# Altium PCB PCB1-B-EVT2.PcbDoc (part 3 of 5)
Units mil, origin at the board's own origin, x right, y up, seen from the top; angles counter-clockwise.
Board outline 3000.03 x 3779.56 mil, 2 copper layers (Top Layer, Bottom Layer); 115 components, 91 nets, 486 pads, 285 vias.
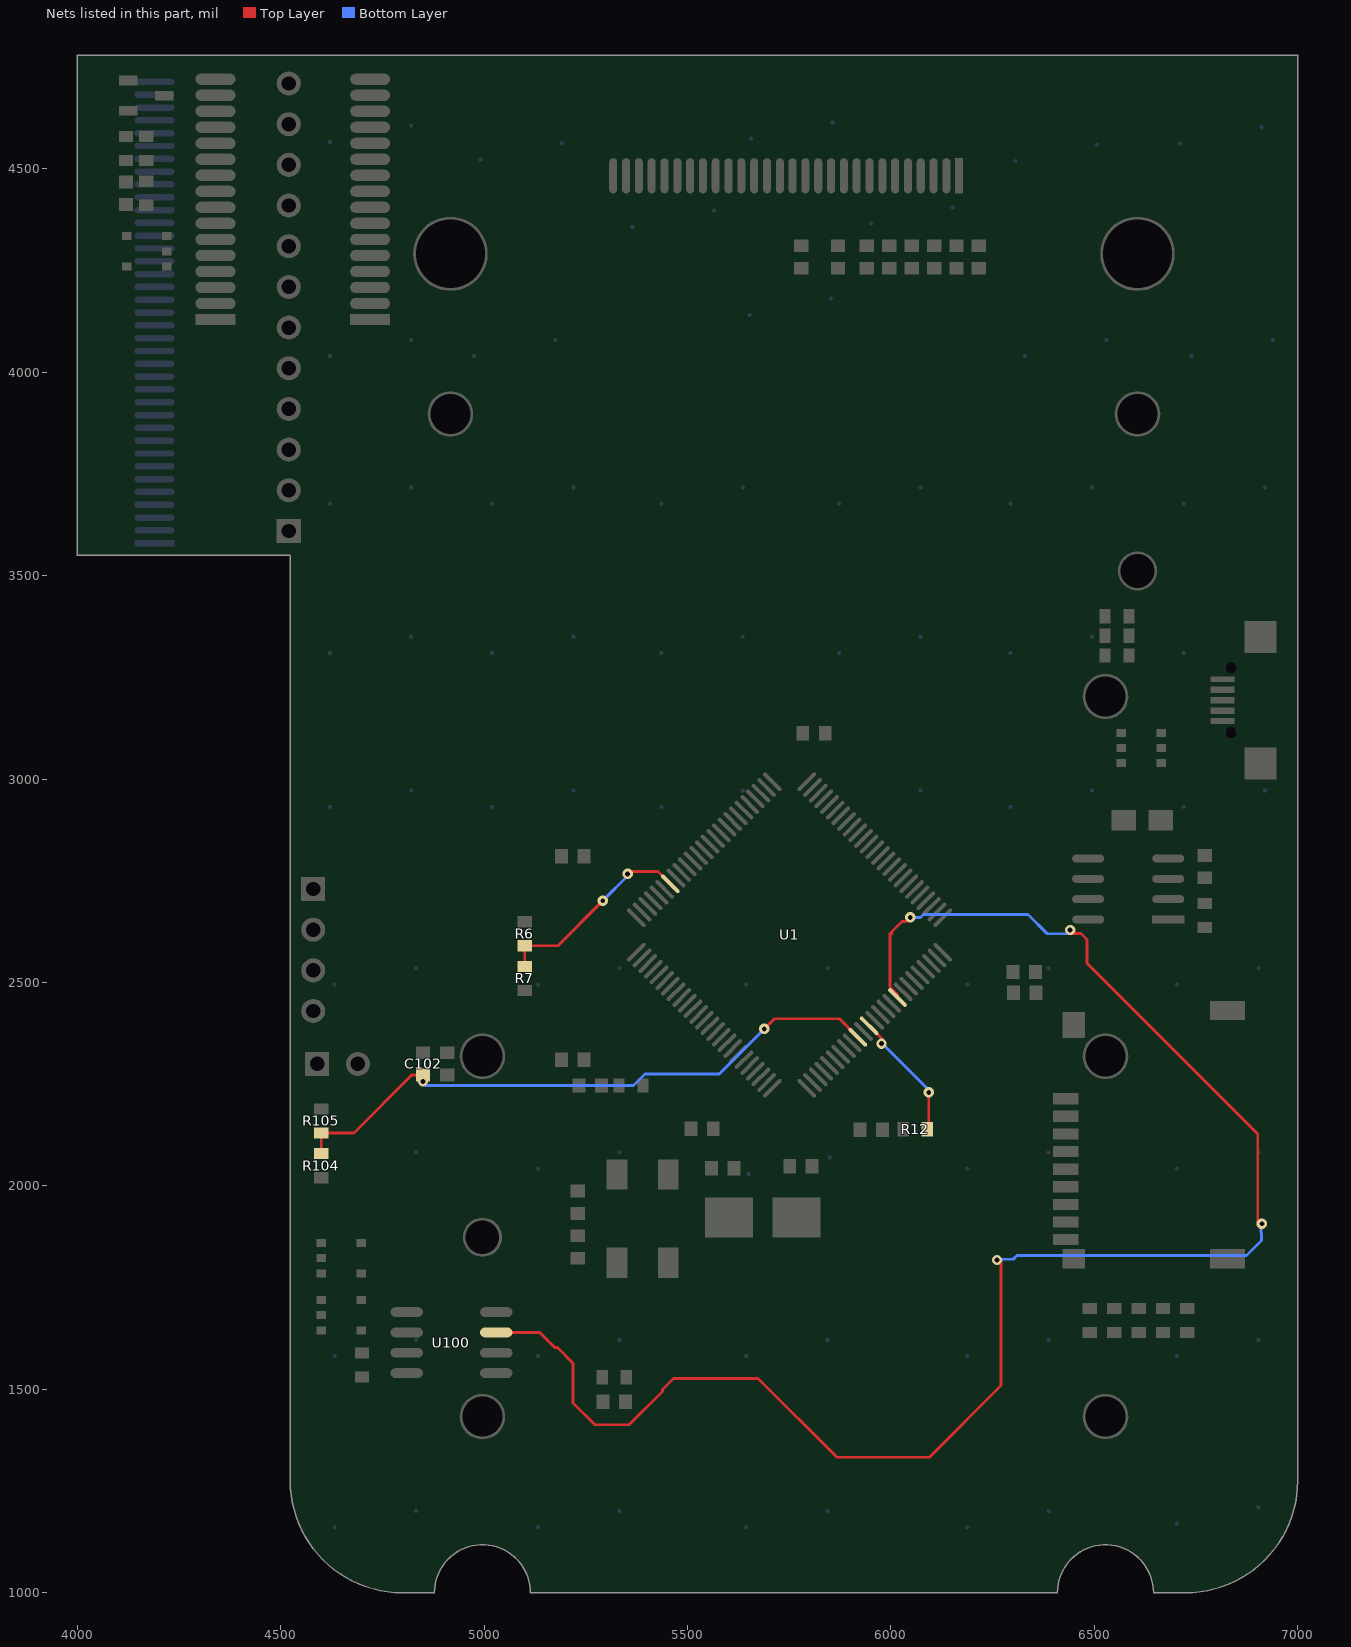
[diagram p3: the nets of this part, all layers, seen from the top]

## Footprints (in the part's own frame and the unit in brackets; to place one, negate y for a bottom-side part, rotate by r counter-clockwise, add the part's x,y. Pads: shape width x height; smd on the part's side, far side on the other; paste and mask are expansions set on the pad) (continued)
Button#33 [mil]
  round 10 smd: 1(120,0) 2(320,-40)
  Top Layer lines w7: 320.19,-12 320,-12 311,-12 146,-12 ; 319,26 312.93,26 150,26 ; 312,-47 299.5,-47 160,-47 ; 304,6 136.5,6 129,6 126.5,6 126,6 ; 303,62 302,62 301.5,62 293,62 172,62 ; 291,-30 148,-30 141.5,-30 129,-30 127,-30 ; 287,44 145,44 134,44 ; 268,-65 149,-65
  Top Layer lines w10: 238.02,-101.12 ccw(c222.55,-0.14) 314.65,-44.35 ccw(c222.55,-0.14) 316.61,-40 ; 235.89,101.15 cw(c222.55,-0.14) 237,101 cw(c222.55,-0.14) 260.14,94.86 cw(c222.55,-0.14) 305.5,59.5 cw(c222.55,-0.14) 307.73,56.27 cw(c222.55,-0.14) 308.66,54.84 ; 323.57,-15.38 ccw(c222.55,-0.14) 324,-12.18 ccw(c222.55,-0.14) 324,11.91 ccw(c222.55,-0.14) 320,30.53 ccw(c222.55,-0.14) 319,33.55 ccw(c222.55,-0.14) 317.55,37.45 ; 323.57,-15.38 cw(c222.55,-0.14) 320,-30.81 ; 323.57,-15.38 cw(c222.55,-0.14) 320,-30.81 ; 320,-30.81 cw(c222.55,-0.14) 316.61,-40 ; 320,-30.81 cw(c222.55,-0.14) 316.61,-40 ; 317.55,37.45 ccw(c222.55,-0.14) 312.93,47.49 ; 317.55,37.45 ccw(c222.55,-0.14) 312.93,47.49 ; 312.93,47.49 ccw(c222.55,-0.14) 308.66,54.84 ; 312.93,47.49 ccw(c222.55,-0.14) 308.66,54.84 ; 211.96,-101.38 cw(c223.45,0.14) 138.27,-56.27 ; 211.96,-101.38 cw(c223.45,0.14) 138.27,-56.27 ; 211.96,-101.38 cw(c223.45,0.14) 138.27,-56.27 ; 211.96,-101.38 cw(c223.45,0.14) 138.27,-56.27 ; 208.82,101.24 ccw(c223.45,0.14) 168.01,85.95 ; 208.82,101.24 ccw(c223.45,0.14) 168.01,85.95 ; 208.82,101.24 ccw(c223.45,0.14) 168.01,85.95 ; 208.82,101.24 ccw(c223.45,0.14) 168.01,85.95 ; 168.01,85.94 ccw(c223.45,0.14) 137.64,55.58 ; 168.01,85.94 ccw(c223.45,0.14) 137.64,55.58 ; 168.01,85.95 ccw(c223.45,0.14) 137.64,55.58 ; 168.01,85.94 ccw(c223.45,0.14) 137.64,55.58 ; 138.27,-56.27 cw(c223.45,0.14) 135.01,-51.01 ; 138.27,-56.27 cw(c223.45,0.14) 135.01,-51.01 ; 138.27,-56.27 cw(c223.45,0.14) 135.01,-51.01 ; 138.27,-56.27 cw(c223.45,0.14) 135.01,-51.01 ; 137.64,55.57 ccw(c223.45,0.14) 134,49.49 ; 137.64,55.57 ccw(c223.45,0.14) 134,49.49 ; 137.64,55.57 ccw(c223.45,0.14) 134,49.49 ; 137.64,55.58 ccw(c223.45,0.14) 134,49.49 ; 135.01,-51.01 cw(c223.45,0.14) 132.2,-45.8 ; 135.01,-51.01 cw(c223.45,0.14) 132.2,-45.8 ; 135.01,-51.01 cw(c223.45,0.14) 132.2,-45.8 ; 135.01,-51.01 cw(c223.45,0.14) 132.2,-45.8 ; 134,49.49 ccw(c223.45,0.14) 131.18,44 ; 134,49.49 ccw(c223.45,0.14) 131.18,44 ; 134,49.49 ccw(c223.45,0.14) 131.18,44 ; 134,49.49 ccw(c223.45,0.14) 131.18,44 ; 132.2,-45.8 cw(c223.45,0.14) 129,-38.81 ; 132.2,-45.8 cw(c223.45,0.14) 129,-38.81 ; 132.2,-45.8 cw(c223.45,0.14) 129,-38.81 ; 132.2,-45.8 cw(c223.45,0.14) 129,-38.81 ; 131.18,44 ccw(c223.45,0.14) 126.5,32.35 ; 131.18,44 ccw(c223.45,0.14) 126.5,32.35 ; 131.18,44 ccw(c223.45,0.14) 126.5,32.35 ; 131.18,44 ccw(c223.45,0.14) 126.5,32.35 ; 129,-38.81 cw(c223.45,0.14) 126.5,-32.08 ; 129,-38.81 cw(c223.45,0.14) 126.5,-32.08 ; 129,-38.81 cw(c223.45,0.14) 126.5,-32.08 ; 129,-38.81 cw(c223.45,0.14) 126.5,-32.08 ; 126.5,-32.08 cw(c223.45,0.14) 125.54,-29.04 ; 126.5,-32.08 cw(c223.45,0.14) 125.54,-29.04 ; 126.5,-32.08 cw(c223.45,0.14) 125.54,-29.04 ; 126.5,-32.08 cw(c223.45,0.14) 125.54,-29.04 ; 126.5,32.35 ccw(c223.45,0.14) 121.29,1.29 ; 126.5,32.35 ccw(c223.45,0.14) 121.29,1.29 ; 126.5,32.35 ccw(c223.45,0.14) 121.29,1.29 ; 126.5,32.35 ccw(c223.45,0.14) 121.29,1.29 ; 126.5,32.35 ccw(c223.45,0.14) 121.29,1.29 ; 126.5,32.35 ccw(c223.45,0.14) 121.29,1.29 ; 126.5,32.35 ccw(c223.45,0.14) 121.29,1.29 ; 126.5,32.35 ccw(c223.45,0.14) 121.29,1.29 ; 125.54,-29.04 cw(c223.45,0.14) 121.3,-1.3 ; 125.54,-29.04 cw(c223.45,0.14) 121.3,-1.3 ; 125.54,-29.04 cw(c223.45,0.14) 121.3,-1.3 ; 125.54,-29.04 cw(c223.45,0.14) 121.3,-1.3 ; 125.54,-29.04 cw(c223.45,0.14) 121.3,-1.3 ; 125.54,-29.04 cw(c223.45,0.14) 121.3,-1.3 ; 125.54,-29.04 cw(c223.45,0.14) 121.3,-1.3 ; 125.54,-29.04 cw(c223.45,0.14) 121.3,-1.3 ; 121.3,-1.3 cw(c223.45,0.14) 121.29,0 ; 121.3,-1.3 cw(c223.45,0.14) 121.29,0 ; 121.3,-1.3 cw(c223.45,0.14) 121.29,0 ; 121.3,-1.3 cw(c223.45,0.14) 121.29,0 ; 121.3,-1.3 cw(c223.45,0.14) 121.29,0 ; 121.3,-1.3 cw(c223.45,0.14) 121.29,0 ; 121.3,-1.3 cw(c223.45,0.14) 121.29,0 ; 121.3,-1.3 cw(c223.45,0.14) 121.29,0 ; 121.29,0 cw(c223.45,0.14) 121.29,1.29 ; 121.29,0 cw(c223.45,0.14) 121.29,1.29 ; 121.29,0 cw(c223.45,0.14) 121.29,1.29 ; 121.29,0 cw(c223.45,0.14) 121.29,1.29 ; 121.29,0 cw(c223.45,0.14) 121.29,1.29 ; 121.29,0 cw(c223.45,0.14) 121.29,1.29 ; 121.29,0 cw(c223.45,0.14) 121.29,1.29 ; 121.29,0 cw(c223.45,0.14) 121.29,1.29
Button#34 [mil]
  round 10 smd: 1(120,0) 2(320,-40)
  Top Layer lines w7: 320.19,-12 319.65,-12 319,-12 315,-12 302.5,-12 146,-12 ; 319,26 150,26 ; 312,-47 298,-47 277.5,-47 160,-47 ; 304,6 136.5,6 127,6 126,6 ; 303,62 302.5,62 172,62 ; 291,-30 141.5,-30 132,-30 127,-30 ; 287,44 136.51,44 134,44 ; 268,-65 149,-65
  Top Layer lines w10: 238.02,-101.12 ccw(c222.55,-0.14) 290,-76.87 ccw(c222.55,-0.14) 313.67,-46.33 ccw(c222.55,-0.14) 314.65,-44.35 ccw(c222.55,-0.14) 317.76,-37.18 ccw(c222.55,-0.14) 319,-33.82 ccw(c222.55,-0.14) 319.65,-31.89 ; 211.95,-101.38 cw(c223.45,0.14) 135.01,-51.01 cw(c223.45,0.14) 131,-43.34 cw(c223.45,0.14) 127,-33.55 cw(c223.45,0.14) 121.29,1.29 cw(c223.45,0.14) 121.46,6 cw(c223.45,0.14) 127,33.82 cw(c223.45,0.14) 127.37,34.86 cw(c223.45,0.14) 128.95,38.95 cw(c223.45,0.14) 208.82,101.24 ; 323.97,-12.46 cw(c222.55,-0.14) 322.8,-19.8 ; 323.97,-12.46 cw(c222.55,-0.14) 322.8,-19.8 ; 323.97,-12.46 ccw(c222.55,-0.14) 320.19,29.92 ; 323.97,-12.46 ccw(c222.55,-0.14) 320.19,29.92 ; 323.97,-12.46 ccw(c222.55,-0.14) 320.19,29.92 ; 323.97,-12.46 ccw(c222.55,-0.14) 320.19,29.92 ; 323.97,-12.46 ccw(c222.55,-0.14) 320.19,29.92 ; 323.97,-12.46 ccw(c222.55,-0.14) 320.19,29.92 ; 323.97,-12.46 ccw(c222.55,-0.14) 320.19,29.92 ; 323.97,-12.46 ccw(c222.55,-0.14) 320.19,29.92 ; 323.97,-12.46 cw(c222.55,-0.14) 322.8,-19.8 ; 323.97,-12.46 cw(c222.55,-0.14) 322.8,-19.8 ; 323.97,-12.46 cw(c222.55,-0.14) 322.8,-19.8 ; 323.97,-12.46 cw(c222.55,-0.14) 322.8,-19.8 ; 323.97,-12.46 cw(c222.55,-0.14) 322.8,-19.8 ; 323.97,-12.46 cw(c222.55,-0.14) 322.8,-19.8 ; 322.8,-19.8 cw(c222.55,-0.14) 319.65,-31.88 ; 322.8,-19.8 cw(c222.55,-0.14) 319.65,-31.88 ; 322.8,-19.8 cw(c222.55,-0.14) 319.65,-31.89 ; 322.8,-19.8 cw(c222.55,-0.14) 319.65,-31.88 ; 320.19,29.92 ccw(c222.55,-0.14) 319.39,32.39 ; 320.19,29.92 ccw(c222.55,-0.14) 319.39,32.39 ; 320.19,29.92 ccw(c222.55,-0.14) 319.39,32.39 ; 320.19,29.92 ccw(c222.55,-0.14) 319.39,32.39 ; 319.39,32.39 ccw(c222.55,-0.14) 319,33.55 ; 319.39,32.39 ccw(c222.55,-0.14) 319,33.55 ; 319.39,32.39 ccw(c222.55,-0.14) 319,33.55 ; 319.39,32.39 ccw(c222.55,-0.14) 319,33.55 ; 319,33.55 ccw(c222.55,-0.14) 306.69,57.81 ; 319,33.55 ccw(c222.55,-0.14) 306.69,57.81 ; 319,33.55 ccw(c222.55,-0.14) 306.69,57.81 ; 319,33.55 ccw(c222.55,-0.14) 306.69,57.81 ; 306.69,57.81 ccw(c222.55,-0.14) 305.5,59.5 ; 306.69,57.81 ccw(c222.55,-0.14) 305.5,59.5 ; 306.69,57.81 ccw(c222.55,-0.14) 305.5,59.5 ; 306.69,57.81 ccw(c222.55,-0.14) 305.5,59.5 ; 305.5,59.5 ccw(c222.55,-0.14) 235.89,101.15 ; 305.5,59.5 ccw(c222.55,-0.14) 235.89,101.15 ; 305.5,59.5 ccw(c222.55,-0.14) 235.89,101.15 ; 305.5,59.5 ccw(c222.55,-0.14) 235.89,101.15
Button#35 [mil]
  round 10 smd: 1(120,0) 2(320,-40)
  Top Layer lines w7: 320.19,-12 318.5,-12 317.5,-12 146,-12 ; 319,26 317.5,26 150,26 ; 312,-47 282.5,-47 160,-47 ; 304,6 139.5,6 127,6 126,6 ; 303,62 172,62 ; 291,-30 152,-30 141.5,-30 127,-30 ; 287,44 160,44 134,44 ; 268,-65 149,-65
  Top Layer lines w10: 211.96,-101.38 cw(c223.45,0.14) 209,-101 cw(c223.45,0.14) 146.7,-67.3 cw(c223.45,0.14) 136.5,-53.5 cw(c223.45,0.14) 134.25,-49.67 cw(c223.45,0.14) 121.29,1.29 cw(c223.45,0.14) 121.46,6 cw(c223.45,0.14) 127,33.82 cw(c223.45,0.14) 128.5,37.84 cw(c223.45,0.14) 128.95,38.95 cw(c223.45,0.14) 142.08,61.92 cw(c223.45,0.14) 208.82,101.24 ; 323.57,-15.38 cw(c222.55,-0.14) 320.19,-30.19 ; 323.57,-15.38 ccw(c222.55,-0.14) 323.57,15.11 ; 323.57,-15.38 cw(c222.55,-0.14) 320.19,-30.19 ; 323.57,-15.38 cw(c222.55,-0.14) 320.19,-30.19 ; 323.57,-15.38 cw(c222.55,-0.14) 320.19,-30.19 ; 323.57,-15.38 cw(c222.55,-0.14) 320.19,-30.19 ; 323.57,-15.38 ccw(c222.55,-0.14) 323.57,15.11 ; 323.57,-15.38 ccw(c222.55,-0.14) 323.57,15.11 ; 323.57,-15.38 ccw(c222.55,-0.14) 323.57,15.11 ; 323.57,-15.38 ccw(c222.55,-0.14) 323.57,15.11 ; 323.57,-15.38 ccw(c222.55,-0.14) 323.57,15.11 ; 323.57,-15.38 ccw(c222.55,-0.14) 323.57,15.11 ; 323.57,-15.38 ccw(c222.55,-0.14) 323.57,15.11 ; 323.57,-15.38 cw(c222.55,-0.14) 320.19,-30.19 ; 323.57,-15.38 cw(c222.55,-0.14) 320.19,-30.19 ; 323.57,-15.38 cw(c222.55,-0.14) 320.19,-30.19 ; 323.57,15.11 ccw(c222.55,-0.14) 319,33.55 ; 323.57,15.11 ccw(c222.55,-0.14) 319,33.55 ; 323.57,15.11 ccw(c222.55,-0.14) 319,33.55 ; 323.57,15.11 ccw(c222.55,-0.14) 319,33.55 ; 323.57,15.11 ccw(c222.55,-0.14) 319,33.55 ; 323.57,15.11 ccw(c222.55,-0.14) 319,33.55 ; 323.57,15.11 ccw(c222.55,-0.14) 319,33.55 ; 323.57,15.11 ccw(c222.55,-0.14) 319,33.55 ; 320.19,-30.19 cw(c222.55,-0.14) 317.6,-37.6 ; 320.19,-30.19 cw(c222.55,-0.14) 317.6,-37.6 ; 320.19,-30.19 cw(c222.55,-0.14) 317.6,-37.6 ; 320.19,-30.19 cw(c222.55,-0.14) 317.6,-37.6 ; 319,33.55 ccw(c222.55,-0.14) 305.5,59.5 ; 319,33.55 ccw(c222.55,-0.14) 305.5,59.5 ; 319,33.55 ccw(c222.55,-0.14) 305.5,59.5 ; 319,33.55 ccw(c222.55,-0.14) 305.5,59.5 ; 317.6,-37.6 cw(c222.55,-0.14) 314.65,-44.35 ; 317.6,-37.6 cw(c222.55,-0.14) 314.65,-44.35 ; 317.6,-37.6 cw(c222.55,-0.14) 314.65,-44.35 ; 317.6,-37.6 cw(c222.55,-0.14) 314.65,-44.35 ; 314.65,-44.35 cw(c222.55,-0.14) 313.67,-46.33 ; 314.65,-44.35 cw(c222.55,-0.14) 313.67,-46.33 ; 314.65,-44.35 cw(c222.55,-0.14) 313.67,-46.33 ; 314.65,-44.35 cw(c222.55,-0.14) 313.67,-46.33 ; 313.67,-46.33 cw(c222.55,-0.14) 283.5,-82.12 ; 313.67,-46.33 cw(c222.55,-0.14) 283.5,-82.12 ; 313.67,-46.33 cw(c222.55,-0.14) 283.5,-82.12 ; 313.67,-46.33 cw(c222.55,-0.14) 283.5,-82.12 ; 305.5,59.5 ccw(c222.55,-0.14) 303.64,62 ; 305.5,59.5 ccw(c222.55,-0.14) 303.64,62 ; 305.5,59.5 ccw(c222.55,-0.14) 303.64,62 ; 305.5,59.5 ccw(c222.55,-0.14) 303.64,62 ; 303.64,62 ccw(c222.55,-0.14) 235.89,101.15 ; 303.64,62 ccw(c222.55,-0.14) 235.89,101.15 ; 303.64,62 ccw(c222.55,-0.14) 235.89,101.15 ; 303.64,62 ccw(c222.55,-0.14) 235.89,101.15 ; 283.5,-82.12 cw(c222.55,-0.14) 268.74,-91.26 ; 283.5,-82.12 cw(c222.55,-0.14) 268.74,-91.26 ; 283.5,-82.12 cw(c222.55,-0.14) 268.74,-91.26 ; 283.5,-82.12 cw(c222.55,-0.14) 268.74,-91.26 ; 268.74,-91.26 cw(c222.55,-0.14) 238.02,-101.12 ; 268.74,-91.26 cw(c222.55,-0.14) 238.02,-101.12 ; 268.74,-91.26 cw(c222.55,-0.14) 238.02,-101.12 ; 268.74,-91.26 cw(c222.55,-0.14) 238.02,-101.12
Button#36 [mil]
  round 10 smd: 1(120,0) 2(320,-40)
  Top Layer lines w7: 320.19,-12 320,-12 319,-12 302.7,-12 146,-12 ; 319,26 299.1,26 150,26 ; 312,-47 305.7,-47 299.7,-47 160,-47 ; 304,6 138.1,6 127,6 126,6 ; 303,62 172,62 ; 291,-30 149.6,-30 143.3,-30 127,-30 ; 287,44 137.6,44 134,44 ; 268,-65 152.8,-65 149,-65
  Top Layer lines w10: 211.96,-101.38 cw(c223.45,0.14) 146.7,-67.3 cw(c223.45,0.14) 121.29,1.29 cw(c223.45,0.14) 121.46,6 cw(c223.45,0.14) 126.78,33.18 cw(c223.45,0.14) 127,33.82 cw(c223.45,0.14) 128.7,38.34 cw(c223.45,0.14) 128.81,38.6 cw(c223.45,0.14) 128.95,38.95 cw(c223.45,0.14) 208.82,101.24 ; 324.64,3.6 cw(c222.55,-0.14) 324.43,-7.76 ; 324.64,3.6 cw(c222.55,-0.14) 324.43,-7.76 ; 324.64,3.6 cw(c222.55,-0.14) 324.43,-7.76 ; 324.64,3.6 cw(c222.55,-0.14) 324.43,-7.76 ; 324.64,3.6 cw(c222.55,-0.14) 324.43,-7.76 ; 324.64,3.6 cw(c222.55,-0.14) 324.43,-7.76 ; 324.64,3.6 cw(c222.55,-0.14) 324.43,-7.76 ; 324.64,3.6 cw(c222.55,-0.14) 324.43,-7.76 ; 324.64,3.6 ccw(c222.55,-0.14) 320.19,29.92 ; 324.64,3.6 ccw(c222.55,-0.14) 320.19,29.92 ; 324.64,3.6 ccw(c222.55,-0.14) 320.19,29.92 ; 324.64,3.6 ccw(c222.55,-0.14) 320.19,29.92 ; 324.64,3.6 ccw(c222.55,-0.14) 320.19,29.92 ; 324.64,3.6 ccw(c222.55,-0.14) 320.19,29.92 ; 324.64,3.6 ccw(c222.55,-0.14) 320.19,29.92 ; 324.64,3.6 ccw(c222.55,-0.14) 320.19,29.92 ; 324.43,-7.76 cw(c222.55,-0.14) 322.17,-22.77 ; 324.43,-7.76 cw(c222.55,-0.14) 322.17,-22.77 ; 324.43,-7.76 cw(c222.55,-0.14) 322.17,-22.77 ; 324.43,-7.76 cw(c222.55,-0.14) 322.17,-22.77 ; 322.17,-22.78 cw(c222.55,-0.14) 320,-30.81 ; 322.17,-22.78 cw(c222.55,-0.14) 320,-30.81 ; 322.17,-22.78 cw(c222.55,-0.14) 320,-30.81 ; 322.17,-22.78 cw(c222.55,-0.14) 320,-30.81 ; 322.17,-22.78 cw(c222.55,-0.14) 320,-30.81 ; 322.17,-22.78 cw(c222.55,-0.14) 320,-30.81 ; 322.17,-22.78 cw(c222.55,-0.14) 320,-30.81 ; 322.17,-22.78 cw(c222.55,-0.14) 320,-30.81 ; 320.19,29.92 ccw(c222.55,-0.14) 320,30.53 ; 320.19,29.92 ccw(c222.55,-0.14) 320,30.53 ; 320.19,29.92 ccw(c222.55,-0.14) 320,30.53 ; 320.19,29.92 ccw(c222.55,-0.14) 320,30.53 ; 320,-30.81 cw(c222.55,-0.14) 319,-33.82 ; 320,-30.81 cw(c222.55,-0.14) 319,-33.82 ; 320,-30.81 cw(c222.55,-0.14) 319,-33.82 ; 320,-30.81 cw(c222.55,-0.14) 319,-33.82 ; 320,30.53 ccw(c222.55,-0.14) 319,33.55 ; 320,30.53 ccw(c222.55,-0.14) 319,33.55 ; 320,30.53 ccw(c222.55,-0.14) 319,33.55 ; 320,30.53 ccw(c222.55,-0.14) 319,33.55 ; 319,-33.82 cw(c222.55,-0.14) 315.7,-42.09 ; 319,-33.82 cw(c222.55,-0.14) 315.7,-42.09 ; 319,-33.82 cw(c222.55,-0.14) 315.7,-42.09 ; 319,-33.82 cw(c222.55,-0.14) 315.7,-42.09 ; 319,33.55 ccw(c222.55,-0.14) 315.46,42.36 ; 319,33.55 ccw(c222.55,-0.14) 315.46,42.36 ; 319,33.55 ccw(c222.55,-0.14) 315.46,42.36 ; 319,33.55 ccw(c222.55,-0.14) 315.46,42.36 ; 315.7,-42.09 cw(c222.55,-0.14) 314.65,-44.35 ; 315.7,-42.09 cw(c222.55,-0.14) 314.65,-44.35 ; 315.7,-42.09 cw(c222.55,-0.14) 314.65,-44.35 ; 315.7,-42.09 cw(c222.55,-0.14) 314.65,-44.35 ; 315.46,42.36 ccw(c222.55,-0.14) 305.5,59.5 ; 315.46,42.36 ccw(c222.55,-0.14) 305.5,59.5 ; 315.46,42.36 ccw(c222.55,-0.14) 305.5,59.5 ; 315.46,42.36 ccw(c222.55,-0.14) 305.5,59.5 ; 314.65,-44.35 cw(c222.55,-0.14) 313.67,-46.33 ; 314.65,-44.35 cw(c222.55,-0.14) 313.67,-46.33 ; 314.65,-44.35 cw(c222.55,-0.14) 313.67,-46.33 ; 314.65,-44.35 cw(c222.55,-0.14) 313.67,-46.33 ; 313.67,-46.33 cw(c222.55,-0.14) 313.33,-47 ; 313.67,-46.33 cw(c222.55,-0.14) 313.33,-47 ; 313.67,-46.33 cw(c222.55,-0.14) 313.33,-47 ; 313.67,-46.33 cw(c222.55,-0.14) 313.33,-47 ; 313.33,-47 cw(c222.55,-0.14) 308.06,-56.04 ; 313.33,-47 cw(c222.55,-0.14) 308.06,-56.04 ; 313.33,-47 cw(c222.55,-0.14) 308.06,-56.04 ; 313.33,-47 cw(c222.55,-0.14) 308.06,-56.04 ; 308.06,-56.04 cw(c222.55,-0.14) 305.7,-59.49 ; 308.06,-56.04 cw(c222.55,-0.14) 305.7,-59.49 ; 308.06,-56.04 cw(c222.55,-0.14) 305.7,-59.49 ; 308.06,-56.04 cw(c222.55,-0.14) 305.7,-59.49 ; 305.7,-59.49 cw(c222.55,-0.14) 238.02,-101.12 ; 305.7,-59.49 cw(c222.55,-0.14) 238.02,-101.12 ; 305.7,-59.49 cw(c222.55,-0.14) 238.02,-101.12 ; 305.7,-59.49 cw(c222.55,-0.14) 238.02,-101.12 ; 305.5,59.5 ccw(c222.55,-0.14) 303.64,62 ; 305.5,59.5 ccw(c222.55,-0.14) 303.64,62 ; 305.5,59.5 ccw(c222.55,-0.14) 303.64,62 ; 305.5,59.5 ccw(c222.55,-0.14) 303.64,62 ; 303.64,62 ccw(c222.55,-0.14) 235.89,101.15 ; 303.64,62 ccw(c222.55,-0.14) 235.89,101.15 ; 303.64,62 ccw(c222.55,-0.14) 235.89,101.15 ; 303.64,62 ccw(c222.55,-0.14) 235.89,101.15
Button#37 [mil]
  round 10 smd: 1(120,0) 2(320,-40)
  Top Layer lines w7: 320.19,-12 319,-12 302.7,-12 146,-12 ; 319,26 150,26 ; 312,-47 306.7,-47 160,-47 ; 304,6 126,6 ; 303,62 290.2,62 250.99,62 172,62 ; 291,-30 162.7,-30 140.2,-30 127,-30 ; 287,44 152.7,44 134,44 ; 268,-65 227.7,-65 162.7,-65 149,-65
  Top Layer lines w10: 238.02,-101.12 ccw(c222.55,-0.14) 313.67,-46.33 ccw(c222.55,-0.14) 314.65,-44.35 ; 235.89,101.15 cw(c222.55,-0.14) 305.5,59.5 cw(c222.55,-0.14) 319,33.55 cw(c222.55,-0.14) 320.19,29.92 cw(c222.55,-0.14) 324.7,1.46 ; 208.82,101.24 ccw(c223.45,0.14) 204.9,100.6 ccw(c223.45,0.14) 139.7,58.64 ccw(c223.45,0.14) 131.18,44 ccw(c223.45,0.14) 128.95,38.95 ccw(c223.45,0.14) 126,30.81 ccw(c223.45,0.14) 121.46,6 ; 324.7,-1.73 cw(c222.55,-0.14) 314.65,-44.35 ; 324.7,-1.73 cw(c222.55,-0.14) 314.65,-44.35 ; 324.7,-1.73 ccw(c222.55,-0.14) 324.7,1.46 ; 324.7,-1.73 ccw(c222.55,-0.14) 324.7,1.46 ; 211.7,-101.35 cw(c223.45,0.14) 146.7,-67.3 cw(c223.45,0.14) 144.74,-65 cw(c223.45,0.14) 135.01,-51.01 cw(c223.45,0.14) 127,-33.55 cw(c223.45,0.14) 125.33,-28.33 cw(c223.45,0.14) 121.7,-9.03 ; 211.7,-101.35 ccw(c223.45,0.14) 211.95,-101.38 cw(c223.45,0.14) 211.7,-101.35 ; 121.7,-9.03 cw(c223.45,0.14) 121.29,-0.01 ; 121.7,-9.03 cw(c223.45,0.14) 121.29,-0.01 ; 121.46,6 ccw(c223.45,0.14) 121.29,0.42 ; 121.46,6 ccw(c223.45,0.14) 121.29,0.42 ; 121.29,0 cw(c223.45,0.14) 121.29,0.28 ; 121.29,0 cw(c223.45,0.14) 121.29,0.28 ; 121.29,0.28 cw(c223.45,0.14) 121.29,0.42 ; 121.29,0.28 cw(c223.45,0.14) 121.29,0.42
Button#38 [mil]
  round 10 smd: 1(120,0) 2(320,-40)
  Top Layer lines w7: 320.19,-12 320,-12 319.5,-12 317.5,-12 298,-12 146,-12 ; 319,26 313.1,26 312.5,26 236.9,26 150,26 ; 312,-47 302,-47 160,-47 ; 304,6 137.9,6 127,6 126,6 ; 303,62 172,62 ; 291,-30 149.4,-30 143.1,-30 127,-30 ; 287,44 134,44 ; 268,-65 152.6,-65 149,-65
  Top Layer lines w10: 238.02,-101.12 ccw(c222.55,-0.14) 313.33,-47 ccw(c222.55,-0.14) 313.67,-46.33 ; 235.89,101.15 cw(c222.55,-0.14) 305.5,59.5 cw(c222.55,-0.14) 319,33.55 cw(c222.55,-0.14) 319.5,32.08 cw(c222.55,-0.14) 320,30.53 ; 211.96,-101.38 cw(c223.45,0.14) 172.3,-88.3 ; 208.82,101.24 ccw(c223.45,0.14) 131.18,44 ccw(c223.45,0.14) 128.95,38.95 ccw(c223.45,0.14) 128.81,38.6 ccw(c223.45,0.14) 128.5,37.84 ccw(c223.45,0.14) 127,33.82 ccw(c223.45,0.14) 121.46,6 ; 320,-30.81 cw(c222.55,-0.14) 313.67,-46.33 ; 320,-30.81 cw(c222.55,-0.14) 313.67,-46.33 ; 320,-30.81 ccw(c222.55,-0.14) 320,30.53 ; 320,-30.81 ccw(c222.55,-0.14) 320,30.53 ; 172.3,-88.3 cw(c223.45,0.14) 121.29,1.29 ; 172.3,-88.3 cw(c223.45,0.14) 121.29,1.29 ; 121.46,6 ccw(c223.45,0.14) 121.29,1.29 ; 121.46,6 ccw(c223.45,0.14) 121.29,1.29
Button#39 [mil]
  round 10 smd: 1(120,0) 2(320,-40)
  Top Layer lines w7: 320.19,-12 146,-12 ; 319,26 303.3,26 150,26 ; 312,-47 306.78,-47 160,-47 ; 304,6 127,6 126,6 ; 303,62 301.9,62 172,62 ; 291,-30 154.8,-30 140.5,-30 127,-30 ; 287,44 134,44 ; 268,-65 232.3,-65 156,-65 149,-65
  Top Layer lines w10: 238.02,-101.12 ccw(c222.55,-0.14) 277.9,-86 ; 211.96,-101.38 cw(c223.45,0.14) 211.9,-101.37 cw(c223.45,0.14) 151.11,-72 cw(c223.45,0.14) 144.74,-65 cw(c223.45,0.14) 126,-30.53 cw(c223.45,0.14) 121.95,-11.45 ; 208.82,101.24 ccw(c223.45,0.14) 153.9,74.97 ccw(c223.45,0.14) 128.95,38.95 ccw(c223.45,0.14) 127,33.82 ; 320.19,29.92 ccw(c222.55,-0.14) 235.89,101.15 cw(c222.55,-0.14) 320.19,29.92 ; 320.19,29.92 cw(c222.55,-0.14) 314.65,-44.35 ; 320.19,29.92 cw(c222.55,-0.14) 314.65,-44.35 ; 314.65,-44.35 cw(c222.55,-0.14) 313.67,-46.33 cw(c222.55,-0.14) 313.33,-47 ; 313.33,-47 cw(c222.55,-0.14) 306.78,-57.95 ; 313.33,-47 cw(c222.55,-0.14) 306.78,-57.95 ; 306.78,-57.95 cw(c222.55,-0.14) 280.36,-84.37 ; 306.78,-57.95 cw(c222.55,-0.14) 280.36,-84.37 ; 280.36,-84.37 cw(c222.55,-0.14) 277.9,-86 ; 280.36,-84.37 cw(c222.55,-0.14) 277.9,-86 ; 127,33.82 ccw(c223.45,0.14) 121.43,5.53 ; 127,33.82 ccw(c223.45,0.14) 121.43,5.53 ; 121.95,-11.45 cw(c223.45,0.14) 121.43,-5.26 ; 121.95,-11.45 cw(c223.45,0.14) 121.43,-5.26 ; 121.43,-5.26 cw(c223.45,0.14) 121.29,0 ; 121.43,-5.26 cw(c223.45,0.14) 121.29,0 ; 121.43,5.53 ccw(c223.45,0.14) 121.29,0 ; 121.43,5.53 ccw(c223.45,0.14) 121.29,0
Button#40 [mil]
  round 10 smd: 1(120,0) 2(320,-40)
  Top Layer lines w7: 320.19,-12 320,-12 319,-12 146,-12 ; 319,26 303,26 150,26 ; 312,-47 291.6,-47 284.2,-47 160,-47 ; 304,6 136.1,6 127,6 126,6 ; 303,62 301.6,62 229.6,62 172,62 ; 291,-30 148.6,-30 143.1,-30 127,-30 ; 287,44 136.1,44 134,44 ; 268,-65 167.82,-65 151.6,-65 149,-65
  Top Layer lines w10: 238.02,-101.12 ccw(c222.55,-0.14) 313.67,-46.33 ccw(c222.55,-0.14) 315.1,-43.4 ccw(c222.55,-0.14) 320,-30.81 ; 235.89,101.15 cw(c222.55,-0.14) 282.18,82.82 cw(c222.55,-0.14) 305.5,59.5 cw(c222.55,-0.14) 308.48,55.12 cw(c222.55,-0.14) 319,33.55 cw(c222.55,-0.14) 320,30.53 cw(c222.55,-0.14) 322.08,22.92 ; 211.96,-101.38 cw(c223.45,0.14) 202.72,-99.9 cw(c223.45,0.14) 145.08,-65.4 cw(c223.45,0.14) 121.29,1.29 cw(c223.45,0.14) 121.46,6 cw(c223.45,0.14) 127,33.82 cw(c223.45,0.14) 127.61,35.51 cw(c223.45,0.14) 128.95,38.95 ; 324.51,-6.49 cw(c222.55,-0.14) 322.95,-19.02 ; 324.51,-6.49 cw(c222.55,-0.14) 322.95,-19.02 ; 324.51,-6.49 ccw(c222.55,-0.14) 322.95,18.75 ; 324.51,-6.49 ccw(c222.55,-0.14) 322.95,18.75 ; 322.95,-19.02 cw(c222.55,-0.14) 320,-30.81 ; 322.95,-19.02 cw(c222.55,-0.14) 320,-30.81 ; 322.95,18.75 ccw(c222.55,-0.14) 322.08,22.92 ; 322.95,18.75 ccw(c222.55,-0.14) 322.08,22.92 ; 160.95,80.95 cw(c223.45,0.14) 208.82,101.24 ccw(c223.45,0.14) 160.95,80.95 ; 160.94,80.94 ccw(c223.45,0.14) 142.64,62.64 ; 160.94,80.94 ccw(c223.45,0.14) 142.64,62.64 ; 142.64,62.64 ccw(c223.45,0.14) 128.95,38.95 ; 142.64,62.64 ccw(c223.45,0.14) 128.95,38.95
Button#41 [mil]
  round 10 smd: 1(120,0) 2(320,-40)
  Top Layer lines w7: 320.19,-12 318.7,-12 302.7,-12 146,-12 ; 319,26 302.7,26 150,26 ; 312,-47 308.92,-47 291.7,-47 284.7,-47 282.2,-47 160,-47 ; 304,6 137.2,6 127,6 126,6 ; 303,62 172,62 ; 291,-30 142.2,-30 127.7,-30 127,-30 ; 287,44 137.7,44 134,44 ; 268,-65 165.2,-65 149,-65
  Top Layer lines w10: 235.89,101.15 cw(c222.55,-0.14) 282.18,82.82 cw(c222.55,-0.14) 305.5,59.5 cw(c222.55,-0.14) 316.56,39.86 cw(c222.55,-0.14) 322.08,22.92 cw(c222.55,-0.14) 322.28,22.01 cw(c222.55,-0.14) 322.98,18.58 cw(c222.55,-0.14) 324.53,-6.17 cw(c222.55,-0.14) 324.43,-7.76 cw(c222.55,-0.14) 320,-30.81 ; 211.96,-101.38 cw(c223.45,0.14) 155.55,-76.2 cw(c223.45,0.14) 144.74,-65 cw(c223.45,0.14) 135.01,-51.01 cw(c223.45,0.14) 126,-30.53 cw(c223.45,0.14) 125.83,-30 cw(c223.45,0.14) 125.06,-27.36 cw(c223.45,0.14) 121.7,-9.03 cw(c223.45,0.14) 121.29,1.29 ; 320,-30.81 cw(c222.55,-0.14) 317.11,-38.81 ; 320,-30.81 cw(c222.55,-0.14) 317.11,-38.81 ; 317.11,-38.82 cw(c222.55,-0.14) 313.33,-47 ; 317.11,-38.82 cw(c222.55,-0.14) 313.33,-47 ; 313.33,-47 cw(c222.55,-0.14) 300.9,-65.7 ; 300.9,-65.7 cw(c222.55,-0.14) 261.23,-94.69 ; 300.9,-65.7 cw(c222.55,-0.14) 261.23,-94.69 ; 261.23,-94.69 cw(c222.55,-0.14) 238.02,-101.12 ccw(c222.55,-0.14) 261.23,-94.69 ; 131.18,44 ccw(c223.45,0.14) 128.95,38.95 ccw(c223.45,0.14) 127,33.82 ccw(c223.45,0.14) 126.73,33.03 ccw(c223.45,0.14) 121.7,9.31 ; 131.18,44 cw(c223.45,0.14) 208.82,101.24 ccw(c223.45,0.14) 131.18,44 ; 121.7,9.31 ccw(c223.45,0.14) 121.46,6 ; 121.7,9.31 ccw(c223.45,0.14) 121.46,6 ; 121.46,6 ccw(c223.45,0.14) 121.29,1.29 ; 121.46,6 ccw(c223.45,0.14) 121.29,1.29
Button#42 [mil]
  round 10 smd: 1(120,0) 2(320,-40)
  Top Layer lines w7: 320.19,-12 319,-12 146,-12 ; 319,26 307.2,26 150,26 ; 312,-47 160,-47 ; 304,6 140.2,6 127,6 126,6 ; 303,62 294.7,62 172,62 ; 291,-30 141.2,-30 127,-30 ; 287,44 134,44 ; 268,-65 149,-65
  Top Layer lines w10: 211.96,-101.38 cw(c223.45,0.14) 209,-101 cw(c223.45,0.14) 144.74,-65 cw(c223.45,0.14) 135.01,-51.01 cw(c223.45,0.14) 127,-33.55 cw(c223.45,0.14) 121.29,0 cw(c223.45,0.14) 126,30.81 cw(c223.45,0.14) 127,33.82 cw(c223.45,0.14) 128.95,38.95 cw(c223.45,0.14) 131.18,44 cw(c223.45,0.14) 208.82,101.24 ; 323.87,-13.19 ccw(c222.55,-0.14) 323.87,12.92 ; 323.87,-13.19 ccw(c222.55,-0.14) 323.87,12.92 ; 323.87,-13.19 ccw(c222.55,-0.14) 323.87,12.92 ; 323.87,-13.19 ccw(c222.55,-0.14) 323.87,12.92 ; 323.87,-13.19 ccw(c222.55,-0.14) 323.87,12.92 ; 323.87,-13.19 ccw(c222.55,-0.14) 323.87,12.92 ; 323.87,-13.19 ccw(c222.55,-0.14) 323.87,12.92 ; 323.87,-13.19 ccw(c222.55,-0.14) 323.87,12.92 ; 323.87,-13.2 cw(c222.55,-0.14) 321.7,-24.76 ; 323.87,-13.2 cw(c222.55,-0.14) 321.7,-24.76 ; 323.87,-13.2 cw(c222.55,-0.14) 321.7,-24.76 ; 323.87,-13.2 cw(c222.55,-0.14) 321.7,-24.76 ; 323.87,-13.2 cw(c222.55,-0.14) 321.7,-24.76 ; 323.87,-13.2 cw(c222.55,-0.14) 321.7,-24.76 ; 323.87,-13.2 cw(c222.55,-0.14) 321.7,-24.76 ; 323.87,-13.2 cw(c222.55,-0.14) 321.7,-24.76 ; 323.87,12.93 ccw(c222.55,-0.14) 319,33.55 ; 323.87,12.93 ccw(c222.55,-0.14) 319,33.55 ; 323.87,12.93 ccw(c222.55,-0.14) 319,33.55 ; 323.87,12.93 ccw(c222.55,-0.14) 319,33.55 ; 323.87,12.93 ccw(c222.55,-0.14) 319,33.55 ; 323.87,12.93 ccw(c222.55,-0.14) 319,33.55 ; 323.87,12.93 ccw(c222.55,-0.14) 319,33.55 ; 323.87,12.93 ccw(c222.55,-0.14) 319,33.55 ; 321.7,-24.76 cw(c222.55,-0.14) 319,-33.82 ; 321.7,-24.76 cw(c222.55,-0.14) 319,-33.82 ; 321.7,-24.76 cw(c222.55,-0.14) 319,-33.82 ; 321.7,-24.76 cw(c222.55,-0.14) 319,-33.82 ; 319,-33.82 cw(c222.55,-0.14) 314.65,-44.35 ; 319,-33.82 cw(c222.55,-0.14) 314.65,-44.35 ; 319,-33.82 cw(c222.55,-0.14) 314.65,-44.35 ; 319,-33.82 cw(c222.55,-0.14) 314.65,-44.35 ; 319,33.55 ccw(c222.55,-0.14) 305.5,59.5 ; 319,33.55 ccw(c222.55,-0.14) 305.5,59.5 ; 319,33.55 ccw(c222.55,-0.14) 305.5,59.5 ; 319,33.55 ccw(c222.55,-0.14) 305.5,59.5 ; 314.65,-44.35 cw(c222.55,-0.14) 313.67,-46.33 ; 314.65,-44.35 cw(c222.55,-0.14) 313.67,-46.33 ; 314.65,-44.35 cw(c222.55,-0.14) 313.67,-46.33 ; 314.65,-44.35 cw(c222.55,-0.14) 313.67,-46.33 ; 313.67,-46.33 cw(c222.55,-0.14) 268.74,-91.26 ; 313.67,-46.33 cw(c222.55,-0.14) 268.74,-91.26 ; 313.67,-46.33 cw(c222.55,-0.14) 268.74,-91.26 ; 313.67,-46.33 cw(c222.55,-0.14) 268.74,-91.26 ; 305.5,59.5 ccw(c222.55,-0.14) 303.64,62 ; 305.5,59.5 ccw(c222.55,-0.14) 303.64,62 ; 305.5,59.5 ccw(c222.55,-0.14) 303.64,62 ; 305.5,59.5 ccw(c222.55,-0.14) 303.64,62 ; 303.64,62 ccw(c222.55,-0.14) 263.04,93.66 ; 303.64,62 ccw(c222.55,-0.14) 263.04,93.66 ; 303.64,62 ccw(c222.55,-0.14) 263.04,93.66 ; 303.64,62 ccw(c222.55,-0.14) 263.04,93.66 ; 268.74,-91.26 cw(c222.55,-0.14) 266.77,-92.23 ; 268.74,-91.26 cw(c222.55,-0.14) 266.77,-92.23 ; 268.74,-91.26 cw(c222.55,-0.14) 266.77,-92.23 ; 268.74,-91.26 cw(c222.55,-0.14) 266.77,-92.23 ; 266.77,-92.23 cw(c222.55,-0.14) 238.02,-101.12 ; 266.77,-92.23 cw(c222.55,-0.14) 238.02,-101.12 ; 266.77,-92.23 cw(c222.55,-0.14) 238.02,-101.12 ; 266.77,-92.23 cw(c222.55,-0.14) 238.02,-101.12 ; 263.04,93.66 ccw(c222.55,-0.14) 237,101 ; 263.04,93.66 ccw(c222.55,-0.14) 237,101 ; 263.04,93.66 ccw(c222.55,-0.14) 237,101 ; 263.04,93.66 ccw(c222.55,-0.14) 237,101 ; 237,101 ccw(c222.55,-0.14) 235.89,101.15 ; 237,101 ccw(c222.55,-0.14) 235.89,101.15 ; 237,101 ccw(c222.55,-0.14) 235.89,101.15 ; 237,101 ccw(c222.55,-0.14) 235.89,101.15
Button#43 [mil]
  round 10 smd: 1(120,0) 2(320,-40)
  Top Layer lines w7: 320.19,-12 146,-12 ; 319,26 150,26 ; 312,-47 160,-47 ; 304,6 142.4,6 127,6 126,6 ; 303,62 172,62 ; 291,-30 140.2,-30 129.7,-30 127,-30 ; 287,44 168,44 135.9,44 134,44 ; 268,-65 230.4,-65 223.7,-65 149,-65
  Top Layer lines w10: 322.17,22.5 cw(c222.55,-0.14) 324.71,0.31 cw(c222.55,-0.14) 320.19,-30.19 cw(c222.55,-0.14) 316.61,-40 cw(c222.55,-0.14) 314.65,-44.35 ; 322.17,22.51 ccw(c222.55,-0.14) 235.89,101.15 cw(c222.55,-0.14) 322.17,22.51 ; 314.65,-44.35 cw(c222.55,-0.14) 313.67,-46.33 ; 314.65,-44.35 cw(c222.55,-0.14) 313.67,-46.33 ; 313.67,-46.33 cw(c222.55,-0.14) 268.74,-91.26 ; 313.67,-46.33 cw(c222.55,-0.14) 268.74,-91.26 ; 268.74,-91.26 cw(c222.55,-0.14) 238.02,-101.12 ccw(c222.55,-0.14) 268.74,-91.26 ; 211.96,-101.38 cw(c223.45,0.14) 146.7,-67.3 ; 211.96,-101.38 cw(c223.45,0.14) 146.7,-67.3 ; 211.96,-101.38 cw(c223.45,0.14) 146.7,-67.3 ; 211.96,-101.38 cw(c223.45,0.14) 146.7,-67.3 ; 208.82,101.24 ccw(c223.45,0.14) 128.95,38.95 ; 208.82,101.24 ccw(c223.45,0.14) 128.95,38.95 ; 208.82,101.24 ccw(c223.45,0.14) 128.95,38.95 ; 208.82,101.24 ccw(c223.45,0.14) 128.95,38.95 ; 208.82,101.24 ccw(c223.45,0.14) 128.95,38.95 ; 208.82,101.24 ccw(c223.45,0.14) 128.95,38.95 ; 208.82,101.24 ccw(c223.45,0.14) 128.95,38.95 ; 208.82,101.24 ccw(c223.45,0.14) 128.95,38.95 ; 146.7,-67.3 cw(c223.45,0.14) 144.74,-65 ; 146.7,-67.3 cw(c223.45,0.14) 144.74,-65 ; 146.7,-67.3 cw(c223.45,0.14) 144.74,-65 ; 146.7,-67.3 cw(c223.45,0.14) 144.74,-65 ; 144.74,-65 cw(c223.45,0.14) 135.15,-51.25 ; 144.74,-65 cw(c223.45,0.14) 135.15,-51.25 ; 144.74,-65 cw(c223.45,0.14) 135.15,-51.25 ; 144.74,-65 cw(c223.45,0.14) 135.15,-51.25 ; 135.15,-51.25 cw(c223.45,0.14) 135.01,-51.01 ; 135.15,-51.25 cw(c223.45,0.14) 135.01,-51.01 ; 135.15,-51.25 cw(c223.45,0.14) 135.01,-51.01 ; 135.15,-51.25 cw(c223.45,0.14) 135.01,-51.01 ; 135.01,-51.01 cw(c223.45,0.14) 127,-33.55 ; 135.01,-51.01 cw(c223.45,0.14) 127,-33.55 ; 135.01,-51.01 cw(c223.45,0.14) 127,-33.55 ; 135.01,-51.01 cw(c223.45,0.14) 127,-33.55 ; 128.95,38.95 ccw(c223.45,0.14) 127.72,35.82 ; 128.95,38.95 ccw(c223.45,0.14) 127.72,35.82 ; 128.95,38.95 ccw(c223.45,0.14) 127.72,35.82 ; 128.95,38.95 ccw(c223.45,0.14) 127.72,35.82 ; 128.95,38.95 ccw(c223.45,0.14) 127.72,35.82 ; 128.95,38.95 ccw(c223.45,0.14) 127.72,35.82 ; 128.95,38.95 ccw(c223.45,0.14) 127.72,35.82 ; 128.95,38.95 ccw(c223.45,0.14) 127.72,35.82 ; 127.72,35.82 ccw(c223.45,0.14) 127,33.82 ; 127.72,35.82 ccw(c223.45,0.14) 127,33.82 ; 127.72,35.82 ccw(c223.45,0.14) 127,33.82 ; 127.72,35.82 ccw(c223.45,0.14) 127,33.82 ; 127.72,35.82 ccw(c223.45,0.14) 127,33.82 ; 127.72,35.82 ccw(c223.45,0.14) 127,33.82 ; 127.72,35.82 ccw(c223.45,0.14) 127,33.82 ; 127.72,35.82 ccw(c223.45,0.14) 127,33.82 ; 127,-33.55 cw(c223.45,0.14) 121.99,-11.79 ; 127,-33.55 cw(c223.45,0.14) 121.99,-11.79 ; 127,-33.55 cw(c223.45,0.14) 121.99,-11.79 ; 127,-33.55 cw(c223.45,0.14) 121.99,-11.79 ; 127,33.82 ccw(c223.45,0.14) 126,30.81 ; 127,33.82 ccw(c223.45,0.14) 126,30.81 ; 127,33.82 ccw(c223.45,0.14) 126,30.81 ; 127,33.82 ccw(c223.45,0.14) 126,30.81 ; 127,33.82 ccw(c223.45,0.14) 126,30.81 ; 127,33.82 ccw(c223.45,0.14) 126,30.81 ; 127,33.82 ccw(c223.45,0.14) 126,30.81 ; 127,33.82 ccw(c223.45,0.14) 126,30.81 ; 126,30.81 ccw(c223.45,0.14) 121.7,9.31 ; 126,30.81 ccw(c223.45,0.14) 121.7,9.31 ; 126,30.81 ccw(c223.45,0.14) 121.7,9.31 ; 126,30.81 ccw(c223.45,0.14) 121.7,9.31 ; 126,30.81 ccw(c223.45,0.14) 121.7,9.31 ; 126,30.81 ccw(c223.45,0.14) 121.7,9.31 ; 126,30.81 ccw(c223.45,0.14) 121.7,9.31 ; 126,30.81 ccw(c223.45,0.14) 121.7,9.31 ; 121.99,-11.79 cw(c223.45,0.14) 121.7,-9.03 ; 121.99,-11.79 cw(c223.45,0.14) 121.7,-9.03 ; 121.99,-11.79 cw(c223.45,0.14) 121.7,-9.03 ; 121.99,-11.79 cw(c223.45,0.14) 121.7,-9.03 ; 121.7,-9.03 cw(c223.45,0.14) 121.29,0 ; 121.7,-9.03 cw(c223.45,0.14) 121.29,0 ; 121.7,-9.03 cw(c223.45,0.14) 121.29,0 ; 121.7,-9.03 cw(c223.45,0.14) 121.29,0 ; 121.7,9.31 ccw(c223.45,0.14) 121.33,2.94 ; 121.7,9.31 ccw(c223.45,0.14) 121.33,2.94 ; 121.7,9.31 ccw(c223.45,0.14) 121.33,2.94 ; 121.7,9.31 ccw(c223.45,0.14) 121.33,2.94 ; 121.7,9.31 ccw(c223.45,0.14) 121.33,2.94 ; 121.7,9.31 ccw(c223.45,0.14) 121.33,2.94 ; 121.7,9.31 ccw(c223.45,0.14) 121.33,2.94 ; 121.7,9.31 ccw(c223.45,0.14) 121.33,2.94 ; 121.33,2.93 ccw(c223.45,0.14) 121.29,1.29 ; 121.33,2.93 ccw(c223.45,0.14) 121.29,1.29 ; 121.33,2.93 ccw(c223.45,0.14) 121.29,1.29 ; 121.33,2.93 ccw(c223.45,0.14) 121.29,1.29 ; 121.29,0 cw(c223.45,0.14) 121.29,1.29 ; 121.29,0 cw(c223.45,0.14) 121.29,1.29 ; 121.29,0 cw(c223.45,0.14) 121.29,1.29 ; 121.29,0 cw(c223.45,0.14) 121.29,1.29
Button#44 [mil]
  round 10 smd: 1(120,0) 2(320,-40)
  Top Layer lines w7: 320.19,-12 319,-12 307.9,-12 303,-12 146,-12 ; 319,26 150,26 ; 312,-47 311.7,-47 295.1,-47 160,-47 ; 304,6 131.7,6 130.7,6 127,6 126,6 ; 303,62 301,62 195.54,62 172,62 ; 291,-30 131.7,-30 130.7,-30 127.7,-30 127,-30 ; 287,44 144.9,44 134,44 ; 268,-65 227.7,-65 149,-65
  Top Layer lines w10: 235.89,101.15 cw(c222.55,-0.14) 249.89,98.3 cw(c222.55,-0.14) 276.18,86.82 cw(c222.55,-0.14) 305.5,59.5 cw(c222.55,-0.14) 309.5,53.5 cw(c222.55,-0.14) 319,33.55 cw(c222.55,-0.14) 320.19,29.92 cw(c222.55,-0.14) 321.31,26 cw(c222.55,-0.14) 324.6,4.7 ; 211.96,-101.38 cw(c223.45,0.14) 144.74,-65 cw(c223.45,0.14) 135.01,-51.01 cw(c223.45,0.14) 130.7,-42.7 cw(c223.45,0.14) 126,-30.53 cw(c223.45,0.14) 125.33,-28.33 cw(c223.45,0.14) 125.06,-27.36 ; 208.82,101.24 ccw(c223.45,0.14) 131.18,44 ccw(c223.45,0.14) 128.95,38.95 ccw(c223.45,0.14) 127,33.82 ; 324.65,-3.73 ccw(c222.55,-0.14) 324.6,4.7 ; 324.65,-3.73 cw(c222.55,-0.14) 314.37,-44.93 ; 324.65,-3.73 cw(c222.55,-0.14) 314.37,-44.93 ; 324.65,-3.73 ccw(c222.55,-0.14) 324.6,4.7 ; 314.37,-44.93 cw(c222.55,-0.14) 313.67,-46.33 ; 314.37,-44.93 cw(c222.55,-0.14) 313.67,-46.33 ; 313.67,-46.33 cw(c222.55,-0.14) 268.74,-91.26 ; 313.67,-46.33 cw(c222.55,-0.14) 268.74,-91.26 ; 268.74,-91.26 cw(c222.55,-0.14) 238.02,-101.12 ccw(c222.55,-0.14) 268.74,-91.26 ; 127,33.82 ccw(c223.45,0.14) 121.46,6 ; 127,33.82 ccw(c223.45,0.14) 121.46,6 ; 125.06,-27.36 cw(c223.45,0.14) 121.29,1.29 ; 125.06,-27.36 cw(c223.45,0.14) 121.29,1.29 ; 121.46,6 ccw(c223.45,0.14) 121.29,1.29 ; 121.46,6 ccw(c223.45,0.14) 121.29,1.29
Button#45 [mil]
  round 10 smd: 1(120,0) 2(320,-40)
  Top Layer lines w7: 320.19,-12 300.6,-12 298.3,-12 146,-12 ; 319,26 150,26 ; 312,-47 297.4,-47 160,-47 ; 304,6 134.5,6 130.5,6 127,6 126,6 ; 303,62 292,62 172,62 ; 291,-30 134.5,-30 130.5,-30 127,-30 ; 287,44 147,44 134,44 ; 268,-65 154.12,-65 149,-65
  Top Layer lines w10: 238.02,-101.12 ccw(c222.55,-0.14) 313.33,-47 ccw(c222.55,-0.14) 317.11,-38.82 ccw(c222.55,-0.14) 319.29,-32.99 ccw(c222.55,-0.14) 324.43,-7.76 ccw(c222.55,-0.14) 322.08,22.92 ccw(c222.55,-0.14) 303.36,62.36 ccw(c222.55,-0.14) 235.89,101.15 ; 211.95,-101.38 cw(c223.45,0.14) 182.65,-93.53 cw(c223.45,0.14) 146.7,-67.3 cw(c223.45,0.14) 144.74,-65 cw(c223.45,0.14) 123,-18.5 cw(c223.45,0.14) 121.53,-6.97 cw(c223.45,0.14) 121.29,1.29 cw(c223.45,0.14) 121.46,6 ; 208.82,101.24 ccw(c223.45,0.14) 128.95,38.95 ccw(c223.45,0.14) 127,33.82 ; 127,33.82 ccw(c223.45,0.14) 126,30.81 ; 127,33.82 ccw(c223.45,0.14) 126,30.81 ; 126,30.81 ccw(c223.45,0.14) 121.46,6 ; 126,30.81 ccw(c223.45,0.14) 121.46,6
Button#46 [mil]
  round 10 smd: 1(120,0) 2(320,-40)
  Top Layer lines w7: 320.19,-12 319,-12 307.9,-12 146,-12 ; 319,26 150,26 ; 312,-47 296.3,-47 160,-47 ; 304,6 145.4,6 128.9,6 127,6 126,6 ; 303,62 172,62 ; 291,-30 154.1,-30 146.9,-30 128.9,-30 127,-30 ; 287,44 143.1,44 134,44 ; 268,-65 149,-65
  Top Layer lines w10: 238.02,-101.12 ccw(c222.55,-0.14) 313.33,-47 ccw(c222.55,-0.14) 320.19,29.92 ; 235.89,101.15 cw(c222.55,-0.14) 282.18,82.82 cw(c222.55,-0.14) 305.5,59.5 cw(c222.55,-0.14) 319,33.55 ; 211.96,-101.38 cw(c223.45,0.14) 211.9,-101.37 cw(c223.45,0.14) 172.3,-88.3 cw(c223.45,0.14) 144.74,-65 cw(c223.45,0.14) 138.9,-57.21 cw(c223.45,0.14) 135.01,-51.01 cw(c223.45,0.14) 128.9,-38.56 cw(c223.45,0.14) 121.29,1.29 cw(c223.45,0.14) 121.46,6 cw(c223.45,0.14) 124.9,27.06 cw(c223.45,0.14) 126,30.81 cw(c223.45,0.14) 127,33.82 cw(c223.45,0.14) 128.95,38.95 cw(c223.45,0.14) 208.82,101.24 ; 320.19,29.92 ccw(c222.55,-0.14) 320,30.53 ; 320.19,29.92 ccw(c222.55,-0.14) 320,30.53 ; 320,30.53 ccw(c222.55,-0.14) 319,33.55 ; 320,30.53 ccw(c222.55,-0.14) 319,33.55
Button#47 [mil]
  round 10 smd: 1(120,0) 2(320,-40)
  Top Layer lines w7: 320.19,-12 320,-12 146,-12 ; 319,26 171.3,26 150,26 ; 312,-47 160,-47 ; 304,6 129.1,6 128.6,6 127,6 126,6 ; 303,62 301.6,62 300.49,62 172,62 ; 291,-30 130.9,-30 129.1,-30 127,-30 ; 287,44 142.8,44 134,44 ; 268,-65 149.1,-65 149,-65
  Top Layer lines w10: 238.02,-101.12 ccw(c222.55,-0.14) 310.8,-51.6 ccw(c222.55,-0.14) 312,-49.49 ccw(c222.55,-0.14) 313.67,-46.33 ccw(c222.55,-0.14) 320,-30.81 ; 235.89,101.15 cw(c222.55,-0.14) 241.26,100.3 cw(c222.55,-0.14) 305.5,59.5 cw(c222.55,-0.14) 308.48,55.12 cw(c222.55,-0.14) 310.29,52.21 cw(c222.55,-0.14) 319,33.55 cw(c222.55,-0.14) 320,30.53 cw(c222.55,-0.14) 320.19,29.92 ; 211.96,-101.38 cw(c223.45,0.14) 144.6,-64.82 cw(c223.45,0.14) 141.6,-61 cw(c223.45,0.14) 135.01,-51.01 cw(c223.45,0.14) 129.1,-39.05 cw(c223.45,0.14) 121.46,6 cw(c223.45,0.14) 126,30.8 cw(c223.45,0.14) 127,33.82 cw(c223.45,0.14) 128.6,38.09 cw(c223.45,0.14) 128.95,38.95 cw(c223.45,0.14) 129.1,39.32 cw(c223.45,0.14) 208.82,101.24 ; 324.38,-8.36 cw(c222.55,-0.14) 323.6,-15.17 ; 324.38,-8.36 cw(c222.55,-0.14) 323.6,-15.17 ; 324.38,-8.36 ccw(c222.55,-0.14) 323.6,14.9 ; 324.38,-8.36 ccw(c222.55,-0.14) 323.6,14.9 ; 323.6,-15.17 cw(c222.55,-0.14) 320,-30.81 ; 323.6,-15.17 cw(c222.55,-0.14) 320,-30.81 ; 323.6,14.9 ccw(c222.55,-0.14) 320.19,29.92 ; 323.6,14.9 ccw(c222.55,-0.14) 320.19,29.92
Button#48 [mil]
  round 10 smd: 1(120,0) 2(320,-40)
  Top Layer lines w7: 320.19,-12 319,-12 146,-12 ; 319,26 150,26 ; 312,-47 160,-47 ; 304,6 140.2,6 127.7,6 127.29,6 127.15,6 127,6 126,6 ; 303,62 290.2,62 172,62 ; 291,-30 140.2,-30 127.7,-30 127,-30 ; 287,44 140.2,44 137.7,44 134,44 ; 268,-65 227.7,-65 165.2,-65 149,-65
  Top Layer lines w10: 235.89,101.15 cw(c222.55,-0.14) 305.5,59.5 cw(c222.55,-0.14) 322.08,22.92 cw(c222.55,-0.14) 322.98,18.58 cw(c222.55,-0.14) 317.6,-37.6 ; 208.82,101.24 ccw(c223.45,0.14) 131.7,45.07 ccw(c223.45,0.14) 128.95,38.95 ccw(c223.45,0.14) 127,33.82 ccw(c223.45,0.14) 123.75,22.45 ccw(c223.45,0.14) 121.29,0 ccw(c223.45,0.14) 121.89,-10.9 ccw(c223.45,0.14) 121.99,-11.79 ccw(c223.45,0.14) 127,-33.55 ccw(c223.45,0.14) 127.7,-35.49 ccw(c223.45,0.14) 135.01,-51.01 ccw(c223.45,0.14) 144.74,-65 ccw(c223.45,0.14) 155.49,-76.15 ccw(c223.45,0.14) 169.67,-86.73 ; 317.6,-37.6 cw(c222.55,-0.14) 313.67,-46.33 ; 317.6,-37.6 cw(c222.55,-0.14) 313.67,-46.33 ; 313.67,-46.33 cw(c222.55,-0.14) 313.33,-47 ; 313.67,-46.33 cw(c222.55,-0.14) 313.33,-47 ; 313.33,-47 cw(c222.55,-0.14) 268.74,-91.26 ; 313.33,-47 cw(c222.55,-0.14) 268.74,-91.26 ; 268.74,-91.26 cw(c222.55,-0.14) 238.02,-101.12 ccw(c222.55,-0.14) 268.74,-91.26 ; 211.7,-101.35 cw(c223.45,0.14) 169.67,-86.73 ; 211.7,-101.35 cw(c223.45,0.14) 169.67,-86.73 ; 211.7,-101.35 ccw(c223.45,0.14) 211.95,-101.38 cw(c223.45,0.14) 211.7,-101.35
Button#49 [mil]
  round 10 smd: 1(120,0) 2(320,-40)
  Top Layer lines w7: 320.19,-12 146,-12 ; 319,26 150,26 ; 312,-47 307,-47 306.7,-47 160,-47 ; 304,6 143.2,6 131.7,6 130.7,6 127,6 126,6 ; 303,62 172,62 ; 291,-30 138.2,-30 131.7,-30 130.7,-30 127,-30 ; 287,44 152.7,44 140.2,44 134,44 ; 268,-65 149,-65
  Top Layer lines w10: 211.96,-101.38 cw(c223.45,0.14) 211.7,-101.35 cw(c223.45,0.14) 144.74,-65 cw(c223.45,0.14) 135.01,-51.01 cw(c223.45,0.14) 130.7,-42.7 cw(c223.45,0.14) 127,-33.55 cw(c223.45,0.14) 122.28,-14.08 cw(c223.45,0.14) 121.7,-9.03 cw(c223.45,0.14) 121.35,3.65 cw(c223.45,0.14) 121.46,6 cw(c223.45,0.14) 121.7,9.31 cw(c223.45,0.14) 124.33,24.87 cw(c223.45,0.14) 124.82,26.75 cw(c223.45,0.14) 127,33.82 cw(c223.45,0.14) 128.95,38.95 cw(c223.45,0.14) 130.7,42.97 cw(c223.45,0.14) 130.73,43.03 cw(c223.45,0.14) 139.03,57.67 cw(c223.45,0.14) 207.22,101 cw(c223.45,0.14) 208.82,101.24 ; 324.71,-1.02 cw(c222.55,-0.14) 324.42,-7.83 ; 324.71,-1.02 cw(c222.55,-0.14) 324.42,-7.83 ; 324.71,-1.02 cw(c222.55,-0.14) 324.42,-7.83 ; 324.71,-1.02 cw(c222.55,-0.14) 324.42,-7.83 ; 324.71,-1.02 cw(c222.55,-0.14) 324.42,-7.83 ; 324.71,-1.02 cw(c222.55,-0.14) 324.42,-7.83 ; 324.71,-1.02 cw(c222.55,-0.14) 324.42,-7.83 ; 324.71,-1.02 ccw(c222.55,-0.14) 324.42,7.56 ; 324.71,-1.02 ccw(c222.55,-0.14) 324.42,7.56 ; 324.71,-1.02 ccw(c222.55,-0.14) 324.42,7.56 ; 324.71,-1.02 cw(c222.55,-0.14) 324.42,-7.83 ; 324.71,-1.02 ccw(c222.55,-0.14) 324.42,7.56 ; 324.42,-7.83 cw(c222.55,-0.14) 320.19,-30.19 ; 324.42,-7.83 cw(c222.55,-0.14) 320.19,-30.19 ; 324.42,-7.83 cw(c222.55,-0.14) 320.19,-30.19 ; 324.42,-7.83 cw(c222.55,-0.14) 320.19,-30.19 ; 324.42,-7.83 cw(c222.55,-0.14) 320.19,-30.19 ; 324.42,-7.83 cw(c222.55,-0.14) 320.19,-30.19 ; 324.42,-7.83 cw(c222.55,-0.14) 320.19,-30.19 ; 324.42,-7.83 cw(c222.55,-0.14) 320.19,-30.19 ; 324.42,7.56 ccw(c222.55,-0.14) 319,33.55 ; 324.42,7.56 ccw(c222.55,-0.14) 319,33.55 ; 324.42,7.56 ccw(c222.55,-0.14) 319,33.55 ; 324.42,7.56 ccw(c222.55,-0.14) 319,33.55 ; 324.42,7.56 ccw(c222.55,-0.14) 319,33.55 ; 324.42,7.56 ccw(c222.55,-0.14) 319,33.55 ; 324.42,7.56 ccw(c222.55,-0.14) 319,33.55 ; 324.42,7.56 ccw(c222.55,-0.14) 319,33.55 ; 320.19,-30.19 cw(c222.55,-0.14) 318.51,-35.19 ; 320.19,-30.19 cw(c222.55,-0.14) 318.51,-35.19 ; 320.19,-30.19 cw(c222.55,-0.14) 318.51,-35.19 ; 320.19,-30.19 cw(c222.55,-0.14) 318.51,-35.19 ; 319,33.55 ccw(c222.55,-0.14) 305.5,59.5 ; 319,33.55 ccw(c222.55,-0.14) 305.5,59.5 ; 319,33.55 ccw(c222.55,-0.14) 305.5,59.5 ; 319,33.55 ccw(c222.55,-0.14) 305.5,59.5 ; 318.51,-35.19 cw(c222.55,-0.14) 315.6,-42.32 ; 318.51,-35.19 cw(c222.55,-0.14) 315.6,-42.32 ; 318.51,-35.19 cw(c222.55,-0.14) 315.6,-42.32 ; 318.51,-35.19 cw(c222.55,-0.14) 315.6,-42.32 ; 315.6,-42.32 cw(c222.55,-0.14) 313.33,-47 ; 315.6,-42.32 cw(c222.55,-0.14) 313.33,-47 ; 315.6,-42.32 cw(c222.55,-0.14) 313.33,-47 ; 315.6,-42.32 cw(c222.55,-0.14) 313.33,-47 ; 313.33,-47 cw(c222.55,-0.14) 266.77,-92.23 ; 313.33,-47 cw(c222.55,-0.14) 266.77,-92.23 ; 313.33,-47 cw(c222.55,-0.14) 266.77,-92.23 ; 313.33,-47 cw(c222.55,-0.14) 266.77,-92.23 ; 305.5,59.5 ccw(c222.55,-0.14) 235.89,101.15 ; 305.5,59.5 ccw(c222.55,-0.14) 235.89,101.15 ; 305.5,59.5 ccw(c222.55,-0.14) 235.89,101.15 ; 305.5,59.5 ccw(c222.55,-0.14) 235.89,101.15 ; 266.77,-92.23 cw(c222.55,-0.14) 260.73,-94.89 ; 266.77,-92.23 cw(c222.55,-0.14) 260.73,-94.89 ; 266.77,-92.23 cw(c222.55,-0.14) 260.73,-94.89 ; 266.77,-92.23 cw(c222.55,-0.14) 260.73,-94.89 ; 260.73,-94.89 cw(c222.55,-0.14) 238.02,-101.12 ; 260.73,-94.89 cw(c222.55,-0.14) 238.02,-101.12 ; 260.73,-94.89 cw(c222.55,-0.14) 238.02,-101.12 ; 260.73,-94.89 cw(c222.55,-0.14) 238.02,-101.12
Button#50 [mil]
  round 10 smd: 1(120,0) 2(320,-40)
  Top Layer lines w10: 320.19,-12 309.8,-12 303.7,-12 146,-12 ; 319,26 306.2,26 150,26 ; 312,-47 305,-47 160,-47 ; 304,6 132,6 131,6 127,6 126,6 ; 303,62 172,62 ; 291,-30 146,-30 132,-30 131,-30 128.5,-30 127,-30 ; 287,44 143.8,44 134,44 ; 268,-65 231.26,-65 195.7,-65 149,-65 ; 238.02,-101.12 ccw(c222.55,-0.14) 313.33,-47 ; 235.89,101.15 cw(c222.55,-0.14) 303.64,62 cw(c222.55,-0.14) 320.19,29.92 cw(c222.55,-0.14) 324.4,7.8 cw(c222.55,-0.14) 324.6,4.63 ; 211.96,-101.38 cw(c223.45,0.14) 144.74,-65 cw(c223.45,0.14) 135.01,-51.01 cw(c223.45,0.14) 131,-43.34 cw(c223.45,0.14) 126,-30.53 cw(c223.45,0.14) 125.33,-28.33 cw(c223.45,0.14) 124.75,-26.25 cw(c223.45,0.14) 121.29,1.29 cw(c223.45,0.14) 121.46,6 cw(c223.45,0.14) 127,33.82 cw(c223.45,0.14) 128.95,38.95 cw(c223.45,0.14) 131.18,44 cw(c223.45,0.14) 208.82,101.24 ; 324.6,4.63 cw(c222.55,-0.14) 317.11,-38.82 ; 324.6,4.63 cw(c222.55,-0.14) 317.11,-38.82 ; 317.11,-38.82 cw(c222.55,-0.14) 313.33,-47 ; 317.11,-38.82 cw(c222.55,-0.14) 313.33,-47
CON_16P_1.0MM [mm]
  rect 2.5x0.7 smd: 1(0,0)
  oval 2.5x0.7 smd: 2(0,-1) 3(0,-2) 4(0,-3) 5(0,-4) 6(0,-5) 7(0,-6) 8(0,-7) 9(0,-8) 10(0,-9) 11(0,-10) 12(0,-11) 13(0,-12) 14(0,-13) 15(0,-14) 16(0,-15)
HDR1X2 [mm] "Connector; Header; 2 Position"
  rect 1.5x1.5 hole 0.9: 1(0,0)
  round 1.5 hole 0.9: 2(2.54,0)
  silkscreen extent -1.27,-1.27 3.81,1.27
HDR1X4 [mm] "Connector; Header; 4 Position"
  rect 1.5x1.5 hole 0.9: 1(0,0)
  round 1.5 hole 0.9: 2(2.54,0) 3(5.08,0) 4(7.62,0)
  silkscreen extent -1.27,-1.27 8.89,1.27
HDR1X12 [mm] "Connector; Header; 12 Position"
  rect 1.5x1.5 hole 0.9: 1(0,0)
  round 1.5 hole 0.9: 2(2.54,0) 3(5.08,0) 4(7.62,0) 5(10.16,0) 6(12.7,0) 7(15.24,0) 8(17.78,0) 9(20.32,0) 10(22.86,0) 11(25.4,0) 12(27.94,0)
  silkscreen extent -1.27,-1.27 29.21,1.27
J1-0603 [mm] "Chip Resistor, Body 1.6x0.8mm, IPC High Density"
  rect 0.7x0.9 smd: 1(-0.75,0) 2(0.75,0)
  silkscreen extent -0.2,-0.35 0.2,0.35, body extent -0.85,-0.48 0.85,0.48, height 0.9
LCD_28P [mm]
  rect 2.2x0.5 smd: 1(0,0)
  oval 2.2x0.5 smd: 2(0,-0.8) 3(0,-1.6) 4(0,-2.4) 5(0,-3.2) 6(0,-4) 7(0,-4.8) 8(0,-5.6) 9(0,-6.4) 10(0,-7.2) 11(0,-8) 12(0,-8.8) 13(0,-9.6) 14(0,-10.4) 15(0,-11.2) 16(0,-12) 17(0,-12.8) 18(0,-13.6) 19(0,-14.4) 20(0,-15.2) 21(0,-16) 22(0,-16.8) 23(0,-17.6) 24(0,-18.4) 25(0,-19.2) 26(0,-20) 27(0,-20.8) 28(0,-21.6)
LCD_37P [mm]
  rect 2.5x0.4 smd: 1(0,0)
  oval 2.5x0.4 smd: 2(0,-0.8) 3(0,-1.6) 4(0,-2.4) 5(0,-3.2) 6(0,-4) 7(0,-4.8) 8(0,-5.6) 9(0,-6.4) 10(0,-7.2) 11(0,-8) 12(0,-8.8) 13(0,-9.6) 14(0,-10.4) 15(0,-11.2) 16(0,-12) 17(0,-12.8) 18(0,-13.6) 19(0,-14.4) 20(0,-15.2) 21(0,-16) 22(0,-16.8) 23(0,-17.6) 24(0,-18.4) 25(0,-19.2) 26(0,-20) 27(0,-20.8) 28(0,-21.6) 29(0,-22.4) 30(0,-23.2) 31(0,-24) 32(0,-24.8) 33(0,-25.6) 34(0,-26.4) 35(0,-27.2) 36(0,-28) 37(0,-28.8)
SM8 [mm]
  rect 1.9x1.3 smd: 1(-2.75,-1.6) 2(2.75,-1.6) 3(2.75,1.6) 4(-2.75,1.6)
  silkscreen extent -4.44,-1.91 4.44,1.91
SO-8 [mil]
  oval 80x24 smd: 1(0,0) 2(0,-50) 3(0,-100) 4(0,-150) 5(220,-150) 6(220,-100) 7(220,-50) 8(220,0)
  silkscreen extent 60,-175 160,25
SOIC8 [mm]
  rect 2x0.5 smd: 1(0,0)
  oval 2x0.5 smd: 2(0,-1.27) 3(0,-2.54) 4(0,-3.81) 5(5,-3.81) 6(5,-2.54) 7(5,-1.27) 8(5,0)
  silkscreen extent 1.27,-4.44 3.68,0.64
SOT-23-5 [mm]
  rect 0.6x0.5 smd: 1(0,0) 2(0,-0.95) 3(0,-1.9) 4(2.5,-1.9) 5(2.5,0)
  silkscreen extent 0.63,-2.38 1.87,0.48
SOT-23-6 [mm]
  rect 0.6x0.5 smd: 1(0,0) 2(0,-0.95) 3(0,-1.9) 4(2.5,-1.9) 5(2.5,-0.95) 6(2.5,0)
  silkscreen extent 0.63,-2.38 1.87,0.48
SOT-23B_N [mm] "SOT23, 3-Leads, Body 2.9x1.3mm, Pitch 0.95mm, Lead Span 2.4mm, IPC Medium Density"
  rect 1.15x0.6 smd: 1(-1.125,0.95) 2(-1.125,-0.95) 3(1.125,0)
  silkscreen extent -1.25,-1.5 0.7,1.92, body extent -0.7,-1.5 0.7,1.5, height 1.14
TF-2 [mm]
  rect 1.4x1.2 smd: 0(-4.55,-7.75)
  rect 1.4x1.6 smd: 0(-4.55,6.85)
  rect 2.2x1.2 smd: 0(5.05,-7.75) 0(5.05,7.75)
  rect 1.6x0.7 smd: 1(-5.05,2.25) 2(-5.05,1.15) 3(-5.05,0.05) 4(-5.05,-1.05) 5(-5.05,-2.15) 6(-5.05,-3.25) 7(-5.05,-4.35) 8(-5.05,-5.45) 9(-5.05,-6.55)
  silkscreen extent -3.94,-6.88 9.47,6.86
USB-MICRO [mm]
  rect 0.35x1.5 smd: 1(-1.3,2.675) 5(1.3,2.675)
  rect 0.4x1.5 smd: 2(-0.65,2.675) 3(0,2.675) 4(0.65,2.675)
  round 0.7 hole 0.7 unplated: 6(-2.032,2.134) 7(2.032,2.134)
  rect 2x2 smd: 8(-3.95,0.3) 9(3.95,0.3)
  silkscreen extent -3.68,-3 3.75,-2

## Part data
BAT: "Header, 2-Pin"
C8 C9 C10 C11 C12 C13 C14 C15 C16 C17 C18 C100 C101 C102 C400 C401 C402 C403 C404 C405 C406 C407 C410 C500: library part "Cap Semi", "Capacitor (Semiconductor SIM Model)"
C19: library part EC
L200: library part BEAD__FERRITE, "EMI Suppression Filters,2A,0805"
P1: "Header, 4-Pin"
PLCD: "Header, 12-Pin"
PLEDB PLEDC: "Header, 16-Pin"
Q400: "PNP Bipolar Transistor"
R1 R6 R7 R12 R102 R103 R104 R105 R200 R201 R202 R300 R301 R302 R303 R304 R400 R401 R402 R500: library part Res3, "Resistor"
U1: "ARM Cortex-M3 Microcontroller"
U500: library part W25X16
X3: library part MC306

## Free pads (board coordinates)
  round 112.2 hole 98.43: 0(4917.32,3897.64) 0(4996.06,1433.07) 0(4996.06,2318.9) 0(6527.56,1433.07) 0(6527.56,2318.9) 0(6527.56,3203.07) 0(6606.3,3897.64)
  round 183.07 hole 169.29: 0(4917.32,4291.34) 0(6606.3,4291.34)
  round 96.46 hole 82.68: 0(4996.06,1874.02) 0(6606.3,3511.81)

## Via types
v1: diameter 25.59, hole 11.81, Top Layer to Bottom Layer, 281 vias
v2: diameter 25.59, hole 11.81, Top Layer to Bottom Layer, tented both sides, 2 vias
v3: diameter 39.37, hole 39.37, Top Layer to Bottom Layer, tented both sides, 2 vias

## Nets (pads, with @x,y where several pads share a name; then routed paths per layer and width w, separated by ;. In a path a pad name is that pad's centre, name@x,y a point inside that pad or via, vN(x,y) a via of type N, cw(c..) or ccw(c..) an arc to the next point about the centre after c; other vN are vias at no path point)
ADC12_IN8: C102.2 R104.2 R105.1 U1.35 | length 1547.2
  Top Layer w7: R104.2@4600,2079.53 R105.1@4600,2130.47 4680.47,2130.47 4822.44,2272.44 C102.2@4850,2272.44 v1(4850,2257) ; v1(5689,2386) 5714,2411 5873.48,2411 U1.35@5918.73,2365.75
  Bottom Layer w7: v1@4856,2247 4850,2253 v1(4850,2257) 4860,2247 5367.73,2247 5396.03,2275.3 5578.3,2275.3 v1(5689,2386)
BOOT0: R6.1 R7.2 U1.94 | length 498.4
  Top Layer w7: R7.2@5100,2539.53 R6.1@5100,2590.47 5181.47,2590.47 v1(5292,2701) ; v1(5353,2767) 5359,2773 5427.97,2773 U1.94@5458,2742.97
  Bottom Layer w7: v1(5292,2701) v1@5355.5,2764.5
BOOT1: R12.1 U1.37 | length 321.2
  Top Layer w7: U1.37@5946.57,2393.59 5980,2360.16 5980,2353 v1(5977,2350) ; R12.1@6089.53,2139 6093,2142.47 v1(6093,2230)
  Bottom Layer w7: v1(5977,2350) 5978,2351 6093,2236 v1(6093,2230)
CHRG: U1.42 U100.7 | length 4213.3
  Top Layer w7: U100.7@5030,1640 5137,1640 5174,1603 5180.38,1603 5219,1564.38 5219,1466.38 5272.38,1413 5356.62,1413 5438.81,1495.19 5438.81,1499.72 5466.09,1527 5673.38,1527 5867.38,1333 6094.62,1333 6271,1509.38 v1@6271,1815 ; 6003.57,2620.57 5997.57,2620.57 ; U1.42@6016.17,2463.19 6016.17,2470.64 5997.57,2489.23 5997.57,2620.57 ; v1(6047.59,2660.27) 6037.32,2650 6027,2650 5997.57,2620.57 ; v1(6261,1818) v1@6268,1818 ; v1(6440.68,2629.3) 6440.68,2624.32 6444.7,2620.3 6467.23,2620.3 6482,2605.53 6482,2547.38 6902,2127.38 6902,1912 6907,1907 v1(6912,1907)
  Bottom Layer w7: v1(6047.59,2660.27) 6047,2659.68 6073.29,2659.68 6080.62,2667 6337.38,2667 6384.38,2620 6431.38,2620 v1(6440.68,2629.3) ; v1(6261,1818) 6272.47,1818 6274.47,1820 6274.77,1819.7 6300.7,1819.7 6310,1829 6874.53,1829 6911.3,1865.77 6911.3,1884.23 6910,1885.53 6910,1905 v1(6912,1907)